# EAGLE board board (EAGLE 7.2.0)
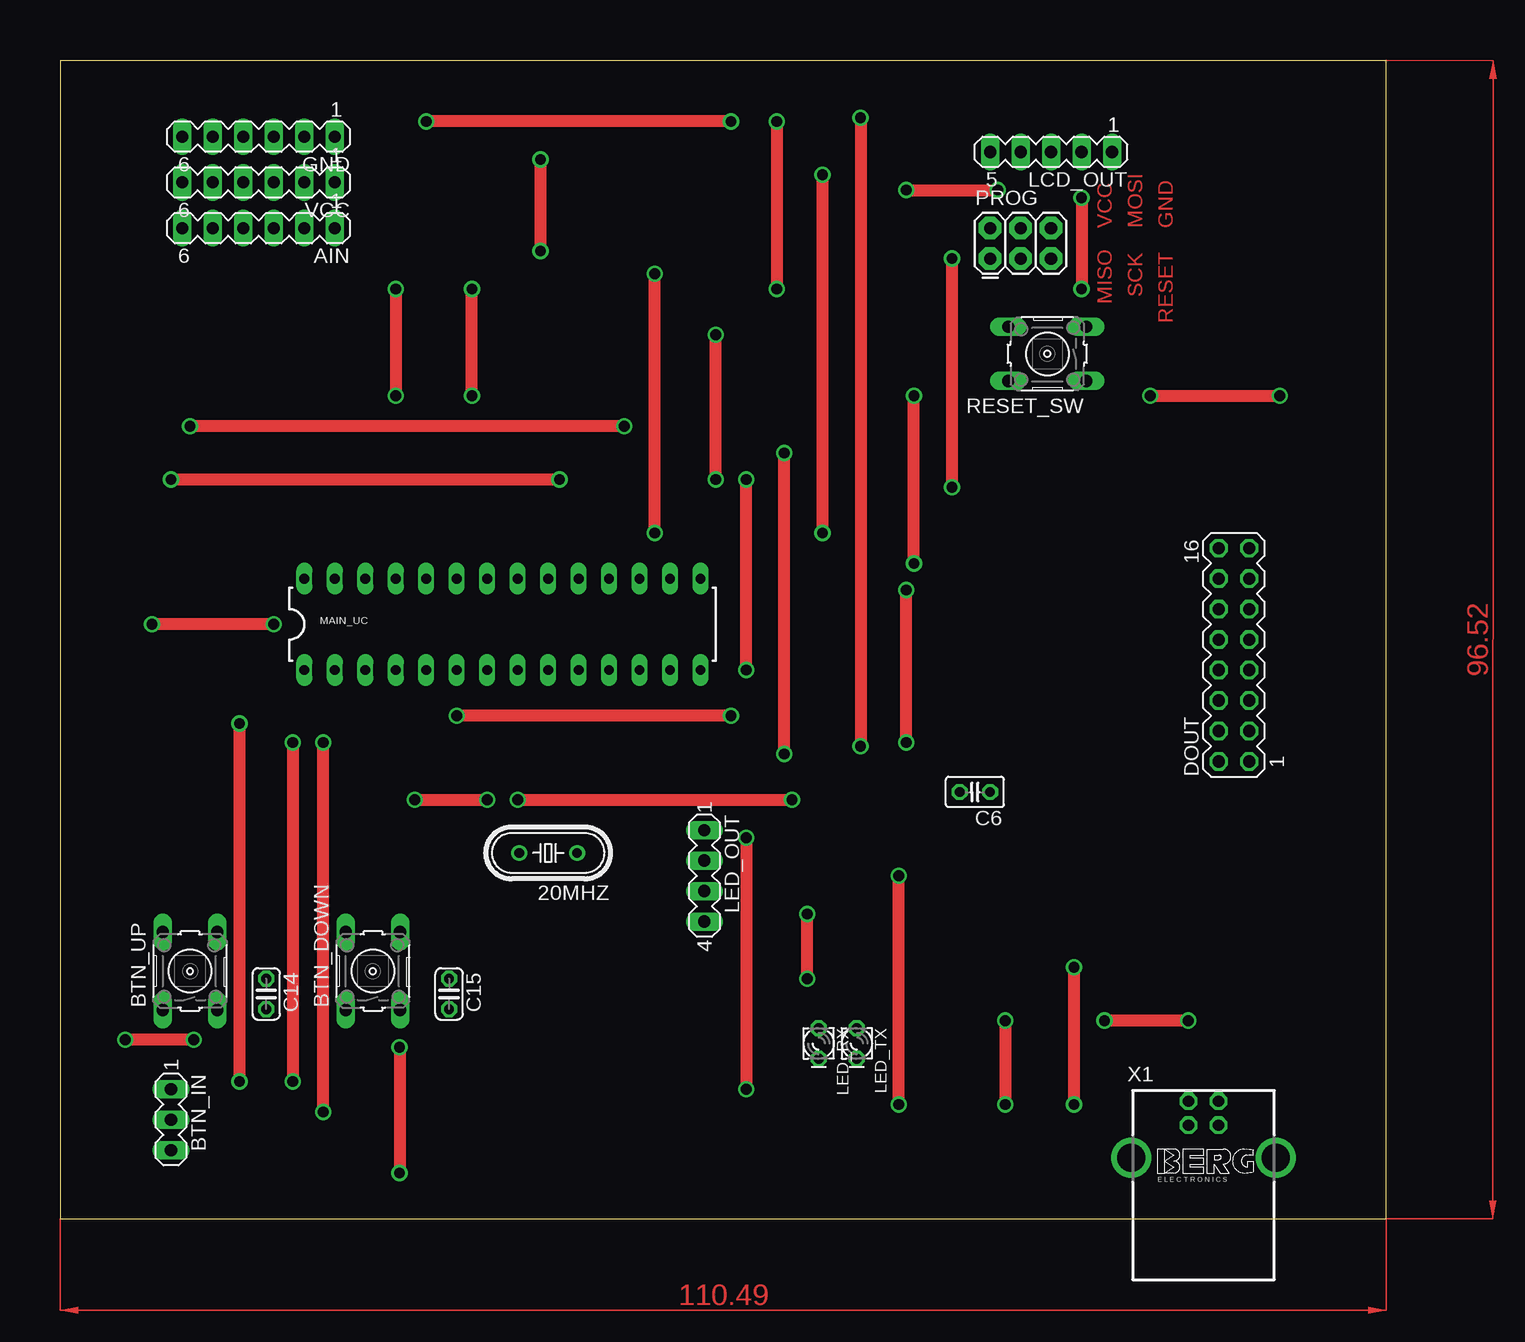
[diagram p0: board, top side]
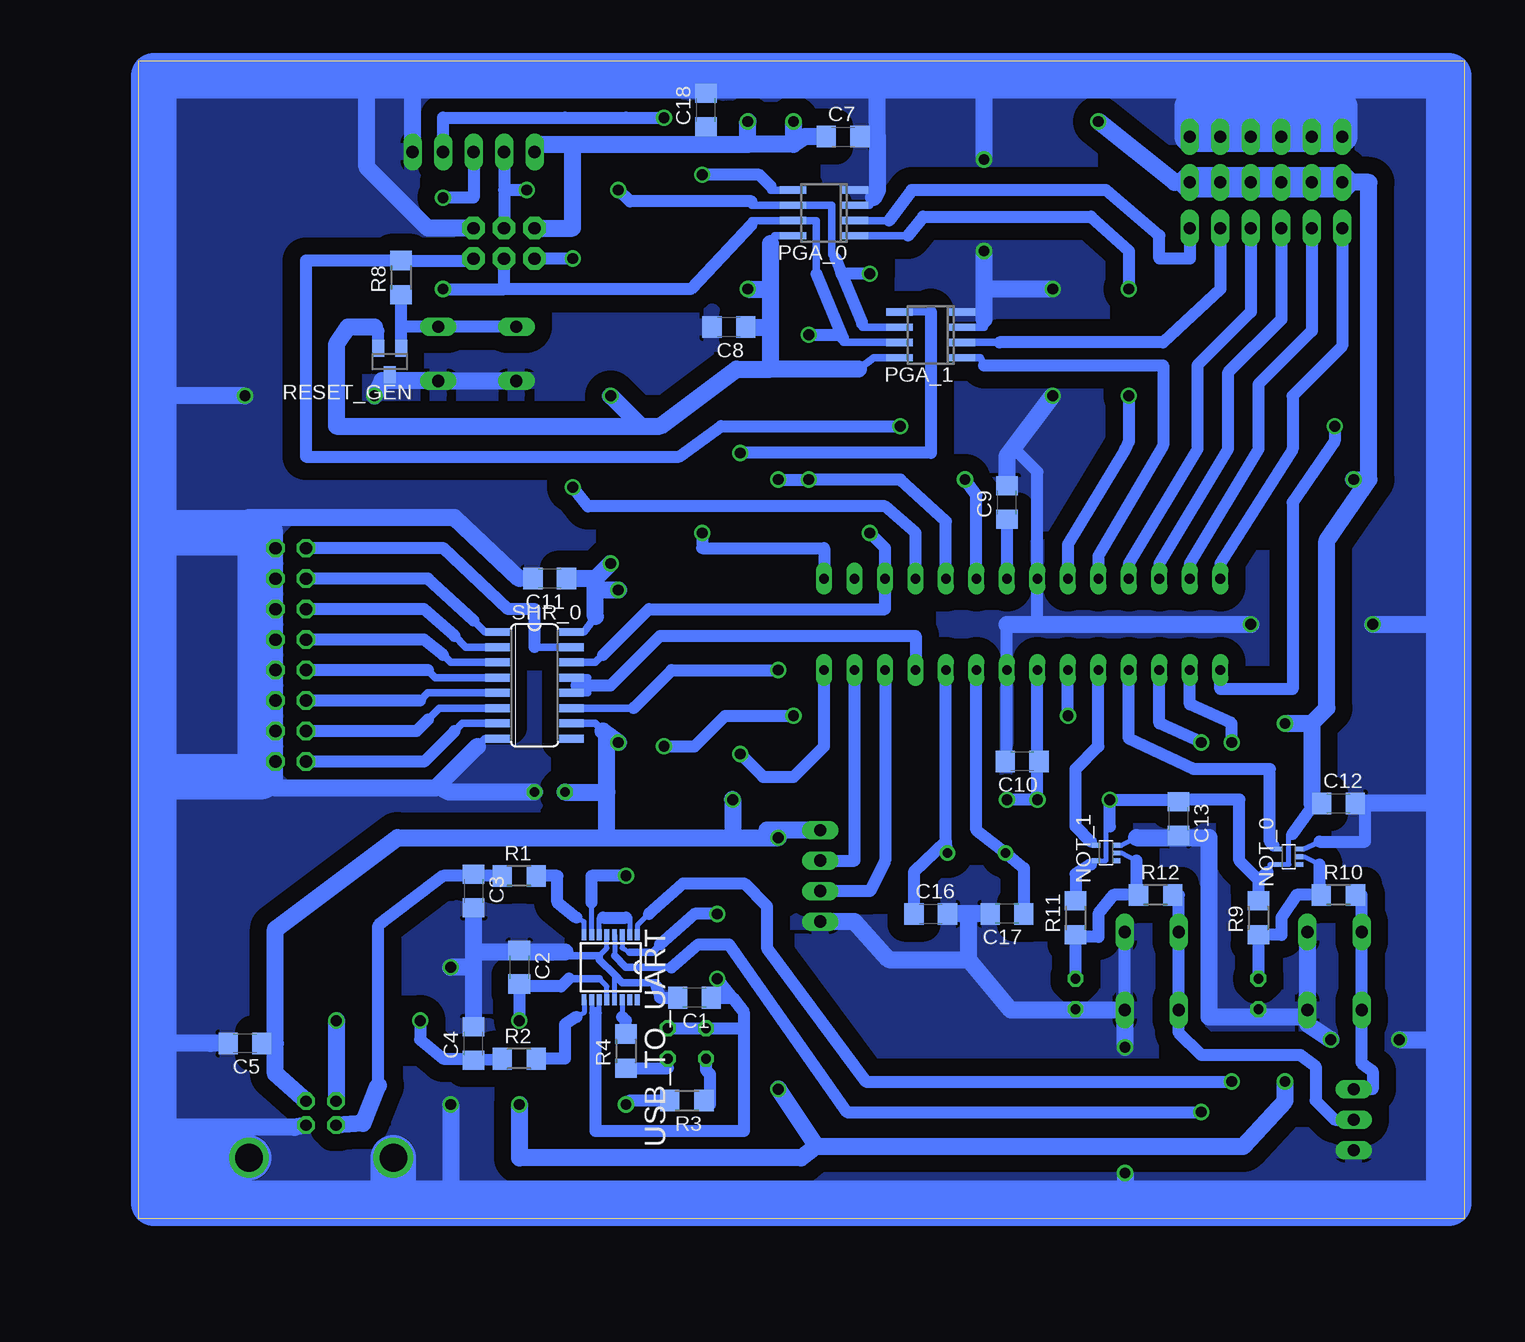
[diagram p1: board, bottom side, seen from below]

Size 110.47 x 96.51 mm. Coordinates in mm from the lower left corner, seen from the top.
Outline: 0,0 110.47,0 110.47,96.51 0,96.51 0,0
Copper layers (1*16): Top 0.035mm / dielectric 1.5mm / Bottom 0.035mm
Design rules "default *": minimum track width 10mil, minimum drill 24mil, track to track 10mil, track to pad 10mil, pad to pad 10mil, via to via 10mil, smd to smd 10mil, copper to edge 40mil, drill to drill 8mil, minimum pad ring 10mil, minimum via ring 8mil, stop-mask expansion 4mil, vias tented up to drill 0mil, thermal gap 10mil
Net classes: 0 default: clearance 0.205 mm

## Footprints (pad centres in the part's own frame; a part is rotated, then mirrored left to right if it is on the bottom)
HC49/S = drill 0.813: 1 -2.413,0; 2 2.413,0
MA06-1 = drill 1.016 long: 1 -6.35,0; 2 -3.81,0; 3 -1.27,0; 4 1.27,0; 5 3.81,0; 6 6.35,0
B3F-10XX = drill 1.016 long: 1 -3.251,2.261; 2 3.251,2.261; 3 -3.251,-2.261; 4 3.251,-2.261
MA03-1 = drill 1.016 long: 1 -2.54,0; 2 0,0; 3 2.54,0
C1206 = smd 1.6 x 1.8: 1 -1.4,0; 2 1.4,0
C025-025X050 = drill 0.813 octagon: 1 -1.27,0; 2 1.27,0
C025-024X044 = drill 0.813 octagon: 1 -1.27,0; 2 1.27,0
MA08-2 = drill 1.016 octagon: 1 -8.89,-1.27; 2 -8.89,1.27; 3 -6.35,-1.27; 4 -6.35,1.27; 5 -3.81,-1.27; 6 -3.81,1.27; 7 -1.27,-1.27; 8 -1.27,1.27; 9 1.27,-1.27; 10 1.27,1.27; 11 3.81,-1.27; 12 3.81,1.27; 13 6.35,-1.27; 14 6.35,1.27; 15 8.89,-1.27; 16 8.89,1.27
MA05-1 = drill 1.016 long: 1 -5.08,0; 2 -2.54,0; 3 0,0; 4 2.54,0; 5 5.08,0
MA04-1 = drill 1.016 long: 1 -3.81,0; 2 -1.27,0; 3 1.27,0; 4 3.81,0
LD260 = drill 0.813 octagon: A -1.27,0; K 1.27,0
DIL28-3 = drill 0.813 long: 1 -16.51,-3.81; 2 -13.97,-3.81; 3 -11.43,-3.81; 4 -8.89,-3.81; 5 -6.35,-3.81; 6 -3.81,-3.81; 7 -1.27,-3.81; 8 1.27,-3.81; 9 3.81,-3.81; 10 6.35,-3.81; 11 8.89,-3.81; 12 11.43,-3.81; 13 13.97,-3.81; 14 16.51,-3.81; 15 16.51,3.81; 16 13.97,3.81; 17 11.43,3.81; 18 8.89,3.81; 19 6.35,3.81; 20 3.81,3.81; 21 1.27,3.81; 22 -1.27,3.81; 23 -3.81,3.81; 24 -6.35,3.81; 25 -8.89,3.81; 26 -11.43,3.81; 27 -13.97,3.81; 28 -16.51,3.81
SC70-5 = smd 0.4 x 0.7: 1 -0.65,-0.85; 2 0,-0.85; 3 0.65,-0.85; 4 0.65,0.85; 5 -0.65,0.85
SO-08 = smd 0.6 x 2.2: 1 -1.905,-2.6; 2 -0.635,-2.6; 3 0.635,-2.6; 4 1.905,-2.6; 5 1.905,2.6; 6 0.635,2.6; 7 -0.635,2.6; 8 -1.905,2.6
2X3 = drill 1.016 pad 1.88 octagon: 1 0,0; 2 0,2.54; 3 2.54,0; 4 2.54,2.54; 5 5.08,0; 6 5.08,2.54
R1206 = smd 1.6 x 1.803: 1 -1.422,0; 2 1.422,0
SOT-23 = smd 1 x 1.4: 1 -0.95,-1.1; 2 0.95,-1.1; 3 0,1.1
SO16 = smd 0.66 x 2.032: 1 -4.445,-3.073; 2 -3.175,-3.073; 3 -1.905,-3.073; 4 -0.635,-3.073; 5 0.635,-3.073; 6 1.905,-3.073; 7 3.175,-3.073; 8 4.445,-3.073; 9 4.445,3.073; 10 3.175,3.073; 11 1.905,3.073; 12 0.635,3.073; 13 -0.635,3.073; 14 -1.905,3.073; 15 -3.175,3.073; 16 -4.445,3.073
SSOP16 = smd 0.914 x 0.406: 1 -2.718,2.223; 2 -2.718,1.587; 3 -2.718,0.953; 4 -2.718,0.318; 5 -2.718,-0.318; 6 -2.718,-0.953; 7 -2.718,-1.587; 8 -2.718,-2.223; 9 2.718,-2.223; 10 2.718,-1.587; 11 2.718,-0.953; 12 2.718,-0.318; 13 2.718,0.318; 14 2.718,0.953; 15 2.718,1.587; 16 2.718,2.223
PN61729-S = drill 0.95 octagon: 1 1.25,4.71; 2 -1.25,4.71; 3 -1.25,2.71; 4 1.25,2.71 | drill 2.3 pad 2.9: S1 -6.02,0; S2 6.02,0

## Placement (x,y rotation side)
20MHZ  [HC49/S]  40.64,30.48 180 top
AIN  [MA06-1]  16.51,82.55 180 top
BTN_DOWN  [B3F-10XX]  26.04,20.64 90 top
BTN_IN  [MA03-1]  9.21,8.26 270 top
BTN_UP  [B3F-10XX]  10.8,20.64 90 top
C1  100n  [C1206]  64.14,18.41 180 bottom
C2  100n  [C1206]  78.74,20.95 270 bottom
C3  47p  [C1206]  82.55,27.3 270 bottom
C4  47p  [C1206]  82.55,14.61 90 bottom
C5  10n  [C1206]  101.6,14.61 180 bottom
C6  4.7u  [C025-025X050]  76.2,35.56 180 top
C7  100n  [C1206]  51.75,90.17 0 bottom
C8  100n  [C1206]  61.28,74.3 180 bottom
C9  10n  [C1206]  38.1,59.69 90 bottom
C10  100n  [C1206]  36.83,38.1 180 bottom
C11  100n  [C1206]  76.2,53.34 180 bottom
C12  100n  [C1206]  10.48,34.61 0 bottom
C13  100n  [C1206]  23.81,33.34 270 bottom
C14  1u  [C025-024X044]  17.14,18.73 270 top
C15  1u  [C025-024X044]  32.38,18.73 270 top
C16  12p  [C1206]  44.45,25.4 0 bottom
C17  12p  [C1206]  38.1,25.4 180 bottom
C18  100n  [C1206]  63.18,92.39 90 bottom
DOUT  [MA08-2]  97.79,46.99 90 top
GND  [MA06-1]  16.51,90.17 180 top
LCD_OUT  [MA05-1]  82.55,88.9 180 top
LED_OUT  [MA04-1]  53.66,28.57 270 top
LED_RX  [LD260]  63.18,14.61 270 top
LED_TX  [LD260]  66.36,14.61 270 top
MAIN_UC  ATMEGA328P_PDIP  [DIL28-3]  36.83,49.53 0 top
NOT_0  74LVC1G14DCK  [SC70-5]  14.61,30.16 90 bottom
NOT_1  74LVC1G14DCK  [SC70-5]  29.84,30.48 90 bottom
PGA_0  MCP6S21I/SN  [SO-08]  53.34,83.82 90 bottom
PGA_1  MCP6S21I/SN  [SO-08]  44.45,73.66 90 bottom
PROG  AVR_SPI_PRG  [2X3]  77.47,80.01 0 top
R1  27  [R1206]  78.74,28.57 0 bottom
R2  27  [R1206]  78.74,13.34 0 bottom
R3  270  [R1206]  64.77,9.84 180 bottom
R4  270  [R1206]  69.85,13.97 90 bottom
R8  5k  [R1206]  88.58,78.42 90 bottom
R9  10k  [R1206]  17.14,25.08 90 bottom
R10  100  [R1206]  10.48,26.99 0 bottom
R11  10k  [R1206]  32.38,25.08 90 bottom
R12  100  [R1206]  25.72,26.99 0 bottom
RESET_GEN  DS1813-SMD  [SOT-23]  89.54,71.44 180 bottom
RESET_SW  [B3F-10XX]  82.23,72.07 180 top
SHR_0  74HC595D  [SO16]  77.47,44.45 270 bottom
USB_TO_UART  FT230XS  [SSOP16]  71.12,20.95 270 bottom
VCC  [MA06-1]  16.51,86.36 180 top
X1  PN61729-S  [PN61729-S]  95.25,5.08 0 top

## Library data of the parts
20MHZ = crystal; OC_FARNELL: 1667008; OC_NEWARK: unknown
AIN BTN_IN DOUT GND LCD_OUT LED_OUT VCC = con-lstb; OC_FARNELL: unknown; OC_NEWARK: unknown
BTN_DOWN BTN_UP RESET_SW = switch-omron; MPN: B3F-1000; OC_FARNELL: 176432; OC_NEWARK: 36M3542
C1-C18 = resistor
LED_RX LED_TX = led
MAIN_UC = SparkFun-DigitalIC
NOT_0 NOT_1 = 74xx-little-us
PGA_0 PGA_1 = MPC6S21
PROG = SparkFun
R1-R4 R8-R12 = rcl
RESET_GEN = ds1813_revised
SHR_0 = 74xx-eu
USB_TO_UART = ftdichip
X1 = con-berg; OC_FARNELL: unknown; OC_NEWARK: unknown

## Nets
ADC_0: MAIN_UC.23 PGA_0.1
ADC_1: MAIN_UC.24 PGA_1.1
ADC_2: AIN.3 MAIN_UC.25
ADC_3: AIN.4 MAIN_UC.26
ADC_4: AIN.5 MAIN_UC.27
ADC_5: AIN.6 MAIN_UC.28
AIN_0: AIN.1 PGA_0.2
AIN_1: AIN.2 PGA_1.2
CS_LCD_0: LCD_OUT.2 MAIN_UC.6
CS_PGA_0: MAIN_UC.15 PGA_0.5
CS_PGA_1: MAIN_UC.14 PGA_1.5
CS_SHR_0: MAIN_UC.11 SHR_0.12 SHR_0.13
D+: C3.1 R1.1 X1.3
D-: C4.1 R2.1 X1.2
DOWN_IN: BTN_DOWN.1 BTN_DOWN.2 BTN_IN.2 R12.2
GND: BTN_DOWN.3 BTN_DOWN.4 BTN_IN.3 BTN_UP.3 BTN_UP.4 C1.2 C2.1 C3.2 C4.2 C5.2 C6.1 C7.2 C8.2 C9.2 C10.2 C11.2 C12.2 C13.2 C14.2 C15.2 C16.2 C17.2 C18.2 DOUT.1 DOUT.3 DOUT.5 DOUT.7 DOUT.9 DOUT.11 DOUT.13 DOUT.15 GND.1 GND.2 GND.3 GND.4 GND.5 GND.6 LCD_OUT.1 LED_OUT.4 MAIN_UC.8 MAIN_UC.22 NOT_0.3 NOT_1.3 PGA_0.3 PGA_0.4 PGA_1.3 PGA_1.4 PROG.6 RESET_GEN.3 RESET_SW.1 RESET_SW.2 SHR_0.8 USB_TO_UART.5 USB_TO_UART.13 X1.4 X1.S1 X1.S2
INT_0: MAIN_UC.4 NOT_0.4
INT_1: MAIN_UC.5 NOT_1.4
LED_ACTIVE: LED_OUT.2 MAIN_UC.13
LED_LCD: LED_OUT.3 MAIN_UC.12
MISO: MAIN_UC.18 PROG.1
MOSI: LCD_OUT.4 MAIN_UC.17 PGA_0.6 PGA_1.6 PROG.4 SHR_0.14
N$1: LED_TX.K R4.1
N$2: R2.2 USB_TO_UART.9
N$3: LED_RX.K R3.1
N$4: DOUT.16 SHR_0.15
N$5: USB_TO_UART.2 USB_TO_UART.6
N$6: R1.2 USB_TO_UART.8
N$7: DOUT.14 SHR_0.1
N$8: DOUT.12 SHR_0.2
N$9: DOUT.10 SHR_0.3
N$10: DOUT.8 SHR_0.4
N$11: DOUT.6 SHR_0.5
N$12: DOUT.4 SHR_0.6
N$13: DOUT.2 SHR_0.7
N$14: C9.1 MAIN_UC.21
N$17: R8.1 RESET_GEN.1 RESET_SW.3 RESET_SW.4
N$20: C14.1 NOT_0.2 R9.1 R10.1
N$21: C15.1 NOT_1.2 R11.1 R12.1
RESET: MAIN_UC.1 PROG.5 R8.2
RX_ON: R3.2 USB_TO_UART.7
RXD: MAIN_UC.3 USB_TO_UART.4
SCK: LCD_OUT.3 MAIN_UC.19 PGA_0.7 PGA_1.7 PROG.3 SHR_0.11
SS: MAIN_UC.16
TX_ON: R4.2 USB_TO_UART.14
TXD: MAIN_UC.2 USB_TO_UART.1
UP_IN: BTN_IN.1 BTN_UP.1 BTN_UP.2 R10.2
VCC: C2.2 C5.1 C6.2 C7.1 C8.1 C10.1 C11.1 C12.1 C13.1 C18.1 LCD_OUT.5 LED_OUT.1 MAIN_UC.7 MAIN_UC.20 NOT_0.5 NOT_1.5 PGA_0.8 PGA_1.8 PROG.2 R9.2 R11.2 RESET_GEN.2 SHR_0.10 SHR_0.16 USB_TO_UART.12 VCC.1 VCC.2 VCC.3 VCC.4 VCC.5 VCC.6 X1.1
VCCIO: C1.1 LED_RX.A LED_TX.A USB_TO_UART.3 USB_TO_UART.10 USB_TO_UART.11
XTAL1: 20MHZ.2 C17.1 MAIN_UC.9
XTAL2: 20MHZ.1 C16.1 MAIN_UC.10

## Tracks (layer width: path | path; a pad name or v marks a point on that pad's centre or on a via)
ADC_0  (via drill 0.9 pad 1.02)
  Top 1.016: v27.94,77.47 v27.94,68.58
  Bottom 0.61: PGA_0.1 46.35,81.92
  Bottom 1.016: MAIN_UC.23 33.02,56.2 28.26,64.14 27.94,64.77 v27.94,68.58 | 46.35,81.92 45.09,83.5 31.11,83.5 27.94,80.64 v27.94,77.47
ADC_1
  Bottom 0.61: PGA_1.1 40.32,71.75 40.01,71.12
  Bottom 1.016: 40.01,71.12 25.08,71.12 25.08,64.45 30.48,55.24 MAIN_UC.24
ADC_2
  Bottom 1.016: AIN.3 17.78,75.56 22.22,71.12 22.22,64.14 27.94,54.61 MAIN_UC.25
ADC_3
  Bottom 1.016: AIN.4 15.24,74.93 19.68,70.48 19.68,64.14 25.4,54.61 MAIN_UC.26
ADC_4
  Bottom 1.016: AIN.5 12.7,73.98 17.14,69.53 17.14,64.14 22.86,54.61 MAIN_UC.27
ADC_5
  Bottom 1.016: AIN.6 10.16,72.71 14.29,68.58 14.29,64.14 20.32,54.61 MAIN_UC.28
AIN_0
  Bottom 0.61: PGA_0.2 47.94,83.19
  Bottom 1.016: AIN.1 22.86,80.01 25.4,80.01 25.4,81.92 29.84,85.72 46.04,85.72 47.94,83.19
AIN_1
  Bottom 0.61: PGA_1.2 38.73,73.03
  Bottom 1.016: AIN.2 20.32,77.47 25.08,73.03 38.73,73.03
CS_LCD_0  (via drill 0.9 pad 1.02)
  Top 1.016: v66.68,91.76 v66.68,39.37 | v55.88,41.91 v33.02,41.91
  Bottom 1.016: LCD_OUT.2 85.09,91.76 74.93,91.76 69.85,91.76 v66.68,91.76 | v66.68,39.37 64.14,39.37 61.59,41.91 v55.88,41.91 | v33.02,41.91 MAIN_UC.6
CS_PGA_0  (via drill 0.9, 0.9 pad 1.02)
  Top 1.016: v63.5,87 v63.5,57.15
  Bottom 0.61: PGA_0.5 57.78,85.72 57.78,86.04
  Bottom 1.016: 57.78,86.04 58.74,87 v63.5,87 | v63.5,57.15 63.5,55.88 53.34,55.88 MAIN_UC.15
CS_PGA_1  (via drill 0.9 pad 1.02)
  Top 1.016: v60.32,38.73 v60.32,63.82
  Bottom 0.61: PGA_1.5 44.45,75.56
  Bottom 1.016: 44.45,75.56 44.45,63.82 v60.32,63.82 | v60.32,38.73 58.42,36.83 55.88,36.83 53.34,39.37 MAIN_UC.14
CS_SHR_0
  Bottom 0.61: SHR_0.12 73.03,43.81 73.98,44.45 73.03,45.09 SHR_0.13
  Bottom 1.016: 73.98,44.45 71.12,44.45 66.99,48.58 45.72,48.58 MAIN_UC.11
D+
  Bottom 1.016: 82.55,28.57 85.09,28.57 90.49,24.45 90.49,11.11 | R1.1 82.55,28.57 | 82.55,28.57 C3.1
  Bottom 1.422: X1.3 91.76,7.94 90.49,11.11
D-  (via drill 0.9)
  Top 1.016: v93.98,16.51 v87,16.51
  Bottom 1.016: R2.1 C4.1 82.55,13.34 85.09,13.34 87,14.92 v87,16.51
  Bottom 1.422: v93.98,16.51 X1.2
DOWN_IN
  Bottom 1.016: R12.2 23.77,26.99 BTN_DOWN.2 BTN_DOWN.1 23.81,17.39 23.81,15.56 21.91,13.65 13.65,13.65 12.38,12.7 12.38,9.84 10.8,8.26 BTN_IN.2
GND  (via drill 0.9, 0.9 pad 1.02)
  Top 1.016: v40.01,80.64 v40.01,88.27 | v34.29,68.58 v34.29,77.47 | v84.46,20.95 v84.46,9.53 | v90.81,68.58 v101.6,68.58 | v17.78,49.53 v7.62,49.53 | v28.26,14.29 v28.26,3.81 | v11.11,14.92 v5.4,14.92
  Bottom 0.406: 13.75,30.8 NOT_0.3 13.44,30.8 12.07,31.43 | NOT_1.3 28.99,31.11 28.57,31.11 27.3,31.75 | USB_TO_UART.13 70.8,20.32 | 72.07,21.91 71.44,22.54 USB_TO_UART.5
  Bottom 0.61: PGA_1.3 40.01,74.3 40.01,74.93 | 40.01,75.56 PGA_1.4 | PGA_0.3 49.53,84.45 49.21,85.09 | 48.89,85.72 PGA_0.4 | SHR_0.8 81.6,40.01 82.23,39.37 | 74.93,22.23 74.93,21.91 72.07,21.91 72.07,21.59 70.8,20.32 70.17,19.68 67.31,19.68 67.31,19.37
  Bottom 1.016: 12.07,31.43 8.25,31.43 8.25,34.61 C12.2 | BTN_DOWN.4 BTN_DOWN.3 28.26,17.39 | 23.81,31.75 C13.2 | 89.85,69.81 RESET_GEN.3 | C10.2 38.1,38.1 MAIN_UC.8 38.1,49.53 | GND.6 GND.5 GND.4 GND.3 GND.2 | 21.59,90.17 GND.2 | GND.1 GND.2 | C18.2 63.82,95.25 | 40.01,95.25 40.01,94.93 40.64,94.93 40.64,95.25 48.89,95.25 | C7.2 48.89,90.17 | C11.2 78.74,53.34 | 101.28,58.42 DOUT.15 DOUT.13 DOUT.11 DOUT.9 DOUT.7 DOUT.5 DOUT.3 DOUT.1 99.06,35.88 99.38,35.88 100.33,36.83 | 78.74,22.23 C2.1 79.06,22.23 | X1.S1 88.9,5.08 88.9,1.27 | RESET_SW.1 89.81,69.81 89.54,69.85 90.17,69.85 | 35.56,49.53 MAIN_UC.22 35.56,62.23 37.46,64.14 | 32.38,17.39 C15.2 | C14.2 17.14,16.83 | 67.31,19.37 66.99,18.41 C1.2
  Bottom 1.422: BTN_UP.4 13.06,16.83 | 1.27,34.61 8.25,34.61 | v28.26,14.29 28.26,17.39 | 27.3,31.75 23.81,31.75 21.27,31.75 21.27,16.83 17.14,16.83 13.06,16.83 | 89.85,69.81 RESET_SW.1 RESET_SW.2 | C17.2 41.27,25.4 | 41.27,25.4 C16.2 | BTN_DOWN.3 32.38,17.39 37.78,17.39 41.27,21.59 | 41.27,21.59 41.27,25.4 | 41.27,21.59 47.94,21.59 50.8,24.77 LED_OUT.4 | PROG.6 86.36,82.55 91.44,87.63 91.44,95.25 | LCD_OUT.1 87.63,95.25 | 40.01,74.93 40.01,75.56 40.01,77.47 | 40.01,77.47 v40.01,80.64 | 48.89,95.25 48.89,90.17 48.89,85.72 49.21,85.09 | v40.01,88.27 40.01,94.93 | v34.29,68.58 38.1,63.5 C9.2 | v34.29,77.47 40.01,77.47 | 78.74,53.34 84.14,58.42 101.28,58.42 | 82.23,39.37 85.57,36.04 | 85.57,36.04 85.73,35.88 99.06,35.88 | 74.93,22.23 78.74,22.23 | X1.4 97.47,7.62 109.22,7.62 | 82.55,20.95 82.55,22.23 | 82.55,22.23 C3.2 | 79.06,22.23 82.55,22.23 | C4.2 82.55,20.95 | 82.55,20.95 v84.46,20.95 | v84.46,9.53 84.46,1.27 | 90.17,69.85 v90.81,68.58 | v101.6,68.58 109.22,68.58 | v17.78,49.53 35.56,49.53 38.1,49.53 | v7.62,49.53 1.27,49.53 | 104.46,14.61 C5.2 109.22,14.61 | C6.1 84.61,35.56 85.57,36.04 | v28.26,3.81 28.26,1.27 | 13.06,16.83 13.02,16.19 v11.11,14.92 | v5.4,14.92 1.27,14.92
  Bottom 2.54: GND.6 GND.1 22.86,92.71 10.16,92.71 GND.6 | GND.6 16.51,90.17 16.51,95.25
  Bottom 3.81: X1.S1 89.23,1.27 | 89.23,1.27 88.9,1.27 84.46,1.27 28.26,1.27 1.27,1.27 1.27,14.92 1.27,34.61 1.27,49.53 1.27,95.25 16.51,95.25 40.01,95.25 40.64,95.25 63.82,95.25 87.63,95.25 91.44,95.25 109.22,95.25 109.22,68.58 109.22,57.15 | 109.22,57.15 109.22,36.83 | 89.23,1.27 109.22,1.27 109.22,5.08 | 109.22,5.08 109.22,7.62 109.22,14.61 109.22,36.83 | 109.22,36.83 100.33,36.83 100.33,57.15 109.22,57.15 | X1.S2 109.22,5.08
  pour Bottom (isolate 1.422): -2.54,99.06 114.3,99.06 114.3,-3.81 -2.54,-3.81
INT_0
  Bottom 0.406: NOT_0.4 15.45,30.8 15.88,31.11
  Bottom 1.016: 15.88,31.11 16.19,31.43 16.19,37.47 22.54,37.47 27.94,40.01 MAIN_UC.4
INT_1
  Bottom 0.406: NOT_1.4 30.7,31.11 31.11,31.43
  Bottom 1.016: 31.11,31.43 32.38,32.7 32.38,37.47 30.48,39.37 MAIN_UC.5
LED_ACTIVE
  Bottom 1.016: LED_OUT.2 50.8,29.84 MAIN_UC.13
LED_LCD
  Bottom 1.016: MAIN_UC.12 48.26,29.84 49.53,27.3 LED_OUT.3
MISO  (via drill 0.9 pad 1.02)
  Top 1.016: v74.3,60.96 v74.3,80.01
  Bottom 1.016: MAIN_UC.18 45.72,57.15 48.26,59.37 73.03,59.37 v74.3,60.96 | v74.3,80.01 PROG.1
MOSI  (via drill 0.9 pad 1.02)
  Top 1.016: v70.48,85.72 v78.11,85.72 | v49.53,57.15 v49.53,78.74
  Bottom 0.61: 52.39,80.01 52.7,80.33 52.7,84.45 PGA_0.6 59.37,84.45 59.37,84.77 | 50.16,74.61 50.16,74.3 PGA_1.6 | SHR_0.14 72.39,46.35 71.76,46.99
  Bottom 1.016: LCD_OUT.4 80.01,85.72 | v78.11,85.72 80.01,85.72 | 80.01,85.72 PROG.4 | 52.39,80.01 51.89,78.81 | 51.89,78.81 50.16,74.61 | 59.37,84.77 69.53,84.77 v70.48,85.72 | v49.53,57.15 48.26,55.88 MAIN_UC.17 48.26,50.8 67.95,50.8 71.76,46.99 | v49.53,78.74 51.89,78.74 51.89,78.81
N$1
  Bottom 1.016: R4.1 66.36,12.55 LED_TX.K
N$2
  Bottom 0.406: USB_TO_UART.9 73.34,17.14 73.98,16.83
  Bottom 1.016: 73.98,16.83 74.93,16.19 74.93,13.34 R2.2
N$3
  Bottom 1.016: LED_RX.K 63.18,12.38 62.87,12.06 62.87,9.53 63.35,9.53 R3.1
N$4
  Bottom 0.61: SHR_0.15 77.47,47.62
  Bottom 1.016: 77.47,47.62 77.47,50.8 79.69,50.8 85.09,55.88 DOUT.16
N$5
  Bottom 0.406: USB_TO_UART.6 72.07,25.08 71.76,25.08 | 69.85,25.08 69.53,25.08 USB_TO_UART.2
  Bottom 1.016: 71.76,25.08 69.85,25.08
N$6
  Bottom 0.406: USB_TO_UART.8 73.34,24.77 73.98,25.08
  Bottom 1.016: 73.98,25.08 75.57,26.35 75.57,28.57 R1.2
N$7
  Bottom 0.61: SHR_0.1 81.6,48.9 82.55,49.85
  Bottom 1.016: 82.55,49.85 86.36,53.34 DOUT.14
N$8
  Bottom 0.61: SHR_0.2 83.19,47.62 84.14,48.58
  Bottom 1.016: 84.14,48.58 86.68,50.8 DOUT.12
N$9
  Bottom 0.61: SHR_0.3 84.46,46.35 85.09,46.99
  Bottom 1.016: 85.09,46.99 86.68,48.26 DOUT.10
N$10
  Bottom 0.61: SHR_0.4 85.73,45.09 86.36,45.72
  Bottom 1.016: 86.36,45.72 DOUT.8
N$11
  Bottom 0.61: SHR_0.5 86.36,43.81 87,43.18
  Bottom 1.016: 87,43.18 DOUT.6
N$12
  Bottom 0.61: SHR_0.6 85.41,42.55 86.36,41.59
  Bottom 1.016: 86.36,41.59 87.31,40.64 DOUT.4
N$13
  Bottom 0.61: SHR_0.7 83.5,41.27 84.14,40.64
  Bottom 1.016: 84.14,40.64 86.68,38.1 DOUT.2
N$14
  Bottom 1.016: C9.1 MAIN_UC.21
N$17
  Bottom 1.016: RESET_SW.4 RESET_SW.3 88.58,74.33 R8.1 | R8.1 88.58,77.15 | RESET_GEN.1 R8.1
N$20
  Bottom 0.406: NOT_0.2 13.34,30.16 12.07,29.53 | 12.07,26.99 R10.1
  Bottom 1.016: 12.07,29.53 12.07,26.99 | R10.1 13.97,26.99 15.24,25.08 15.24,23.66 R9.1 C14.1
N$21
  Bottom 0.406: NOT_1.2 28.57,30.48 27.3,29.84 | 27.3,26.99 R12.1
  Bottom 1.016: C15.1 R11.1 31.75,23.5 30.48,23.5 30.48,25.4 29.21,26.99 R12.1 | 27.3,29.84 27.3,26.99
RESET  (via drill 0.9)
  Top 1.016: v46.99,66.04 v10.8,66.04
  Bottom 1.016: PROG.5 82.55,79.84 R8.2 96.52,79.84 96.52,63.5 65.41,63.5 61.91,66.04 v46.99,66.04 | v10.8,66.04 10.8,64.77 14.29,59.69 14.29,44.13 20.32,44.13 MAIN_UC.1
RX_ON  (via drill 0.9)
  Top 1.016: v69.85,9.53 v69.85,28.57
  Bottom 0.406: USB_TO_UART.7 72.71,26.35
  Bottom 1.016: 72.71,26.35 72.71,28.57 v69.85,28.57 | R3.2 69.53,9.84 v69.85,9.53
RXD  (via drill 0.9 pad 1.02)
  Top 1.016: v21.91,8.89 v21.91,39.69
  Bottom 0.406: USB_TO_UART.4 70.8,21.91
  Bottom 0.61: 70.8,21.91 69.85,20.95 66.04,20.95
  Bottom 1.016: 66.04,20.95 63.82,22.86 61.28,22.86 51.44,8.89 v21.91,8.89 | v21.91,39.69 25.4,41.27 MAIN_UC.3
SCK  (via drill 0.9, 0.9 pad 1.02)
  Top 1.016: v85.09,85.09 v85.09,77.47 | v54.61,61.59 v54.61,73.66 | v57.15,45.72 v57.15,61.59
  Bottom 0.61: 53.98,78.74 53.98,83.19 PGA_0.7 59.37,83.19 59.37,82.87 | 51.75,73.34 51.75,73.03 PGA_1.7 | SHR_0.11 69.22,42.55
  Bottom 1.016: LCD_OUT.3 82.55,85.09 v85.09,85.09 | 80.01,77.47 PROG.3 | v85.09,77.47 80.01,77.47 | 53.98,78.74 51.91,73.73 | 51.91,73.73 51.75,73.34 | 59.37,82.87 64.45,77.47 80.01,77.47 | MAIN_UC.19 43.18,58.1 46.99,61.59 v54.61,61.59 v57.15,61.59 | v54.61,73.66 51.91,73.66 51.91,73.73 | 69.22,42.55 66.04,45.72 v57.15,45.72
TX_ON
  Bottom 0.406: USB_TO_UART.14 70.17,16.83
  Bottom 1.016: R4.2 69.85,16.51 70.17,16.83
TXD  (via drill 0.9 pad 1.02)
  Top 1.016: v19.37,39.69 v19.37,11.43
  Bottom 0.406: 67.95,25.4 68.9,24.45 USB_TO_UART.1
  Bottom 1.016: 67.95,25.4 65.09,27.94 60.01,27.94 58.1,26.04 58.1,22.54 49.85,11.43 v19.37,11.43 | v19.37,39.69 19.37,41.27 22.86,42.86 MAIN_UC.2
UP_IN
  Bottom 1.016: R10.2 8.53,26.99 BTN_UP.2 BTN_UP.1 8.57,17.39 8.57,13.02 7.62,12.31 7.62,10.79 BTN_IN.1
VCC  (via drill 0.9, 0.9 pad 1.02)
  Top 1.016: v29.53,34.92 v35.56,34.92 | v55.88,91.44 v30.48,91.44 | v59.69,91.44 v59.69,77.47 | v70.48,39.69 v70.48,52.39 | v41.59,61.59 v9.21,61.59 | v78.74,16.51 v78.74,9.53 | v57.15,31.75 v57.15,10.79 | v71.12,54.61 v71.12,68.58 | v14.92,11.43 v14.92,41.27 | v38.1,34.92 v60.96,34.92
  Bottom 0.406: 16.41,28.89 16.19,29.21 16.19,29.51 NOT_0.5 15.45,29.53 14.61,29.53 14.61,32.07 14.29,32.07 | 30.7,29.84 31.11,29.53 | NOT_1.5 30.7,29.84 | 30.7,29.84 29.84,29.84 29.84,32.7 29.53,32.7 | USB_TO_UART.12 71.44,19.37 72.07,20
  Bottom 0.61: 57.78,81.28 57.47,81.92 PGA_0.8 | PGA_1.8 49.21,71.75 50.48,70.8 | SHR_0.16 73.34,48.9 72.39,50.16 | SHR_0.10 72.39,41.27 71.76,40.64 | 72.07,20 74.61,20
  Bottom 1.016: 16.41,28.89 17.14,28.26 | 17.14,28.26 R9.2 | 14.29,32.07 12.7,34.29 12.7,34.61 C12.1 | 31.11,29.53 32.38,28.73 R11.2 | 29.53,32.7 v29.53,34.92 23.81,34.92 | 23.81,34.92 C13.1 | 17.14,28.26 18.73,29.84 18.73,34.92 23.81,34.92 | 35.56,38.1 v35.56,34.92 v38.1,34.92 | 35.56,38.1 MAIN_UC.7 | C10.1 35.56,38.1 | LCD_OUT.5 77.47,89.53 77.47,89.85 | 63.18,89.53 C18.1 | 24.13,86.36 VCC.1 | MAIN_UC.20 40.64,60.33 v41.59,61.59 | 74.61,20 75.25,19.37 78.74,19.37 C2.2 v78.74,16.51 | RESET_GEN.2 90.48,73.97 90.81,74.3
  Bottom 1.422: 77.47,89.53 74.3,89.53 | 74.3,89.53 63.18,89.53 | C7.1 54.93,90.17 55.88,89.53 | 55.88,89.53 v55.88,91.44 | v30.48,91.44 24.13,86.36 | 55.88,89.53 59.69,89.53 | 63.18,90.49 63.18,89.53 | 63.18,89.53 59.69,89.53 | 59.69,89.53 v59.69,91.44 | v59.69,77.47 57.78,77.47 | 57.78,77.47 57.78,81.28 | 50.48,70.8 57.78,70.8 | 57.78,70.8 57.78,74.3 | 57.78,74.3 57.78,77.47 | 72.39,50.16 72.39,52.39 | 72.39,53.34 C11.1 | 7.94,61.59 11.43,56.52 11.43,42.55 12.7,41.27 | v9.21,61.59 7.94,61.59 | 7.94,61.59 7.94,86.36 VCC.6 | 12.7,41.27 12.7,34.61 | 90.81,74.3 93.03,74.3 93.98,72.86 93.98,66.04 68.58,66.04 | 68.58,66.04 66.99,66.04 60.64,70.8 57.78,70.8 | X1.1 99.06,12.06 99.06,14.61 | 71.44,31.75 88.9,31.75 99.06,24.13 99.06,14.61 | v78.74,9.53 78.74,5.08 55.24,5.08 53.98,6.03 | 71.44,31.75 60.96,31.75 | 60.96,31.75 58.1,31.75 | 71.44,31.75 71.44,35.56 | 71.44,35.56 71.44,40.32 71.76,40.64 v70.48,39.69 | v57.15,10.79 53.98,6.03 | v70.48,52.39 72.39,52.39 | 72.39,52.39 72.39,53.34 | 72.39,53.34 v71.12,54.61 | v71.12,68.58 68.58,66.04 | 53.98,6.03 18.41,6.03 14.92,9.84 v14.92,11.43 | v14.92,41.27 12.7,41.27 | PROG.2 74.3,82.55 74.3,89.53 | C5.1 99.06,14.61 | C6.2 71.44,35.56 | LED_OUT.1 58.1,32.38 58.1,31.75 | 58.1,31.75 v57.15,31.75 | C8.1 57.78,74.3 | v60.96,34.92 60.96,31.75
  Bottom 2.54: VCC.1 VCC.2 VCC.3 VCC.4 VCC.5 VCC.6
VCCIO  (via drill 0.9 pad 1.02)
  Top 1.016: v62.23,20 v62.23,25.4
  Bottom 0.406: USB_TO_UART.3 70.17,22.54 69.53,22.23 | USB_TO_UART.10 72.71,17.14 72.39,17.14 72.07,17.14 USB_TO_UART.11
  Bottom 0.61: 69.53,22.23 67.63,22.23 66.99,22.86
  Bottom 1.016: 66.99,22.86 64.14,25.4 v62.23,25.4 | 72.39,17.14 72.39,7.3 60.01,7.3 60.01,15.88 | 60.01,15.88 60.01,17.14 | 60.01,17.14 v62.23,20 | C1.1 60.96,18.41 60.01,17.14 | LED_TX.A LED_RX.A 60.01,15.88
XTAL1
  Bottom 1.016: C17.1 36.7,29.21 20MHZ.2 40.64,32.38 MAIN_UC.9
XTAL2
  Bottom 1.016: 43.18,31.43 20MHZ.1 43.18,30.48 43.18,31.43 | 43.18,31.43 45.85,28.89 C16.1 | 43.18,31.43 MAIN_UC.10
(copper drawn outside any net)
  shapes: Top area x2

## Text on the board
Top: VCC | MOSI | GND | SCK | MISO | RESET